# Altium PCB PCB1.PcbDoc
Units mm, origin at the board's own origin, x right, y up, seen from the top; angles counter-clockwise.
Board outline 40 x 25 mm, 2 copper layers (Top Layer, Bottom Layer); 19 components, 8 nets, 76 pads, 13 vias.
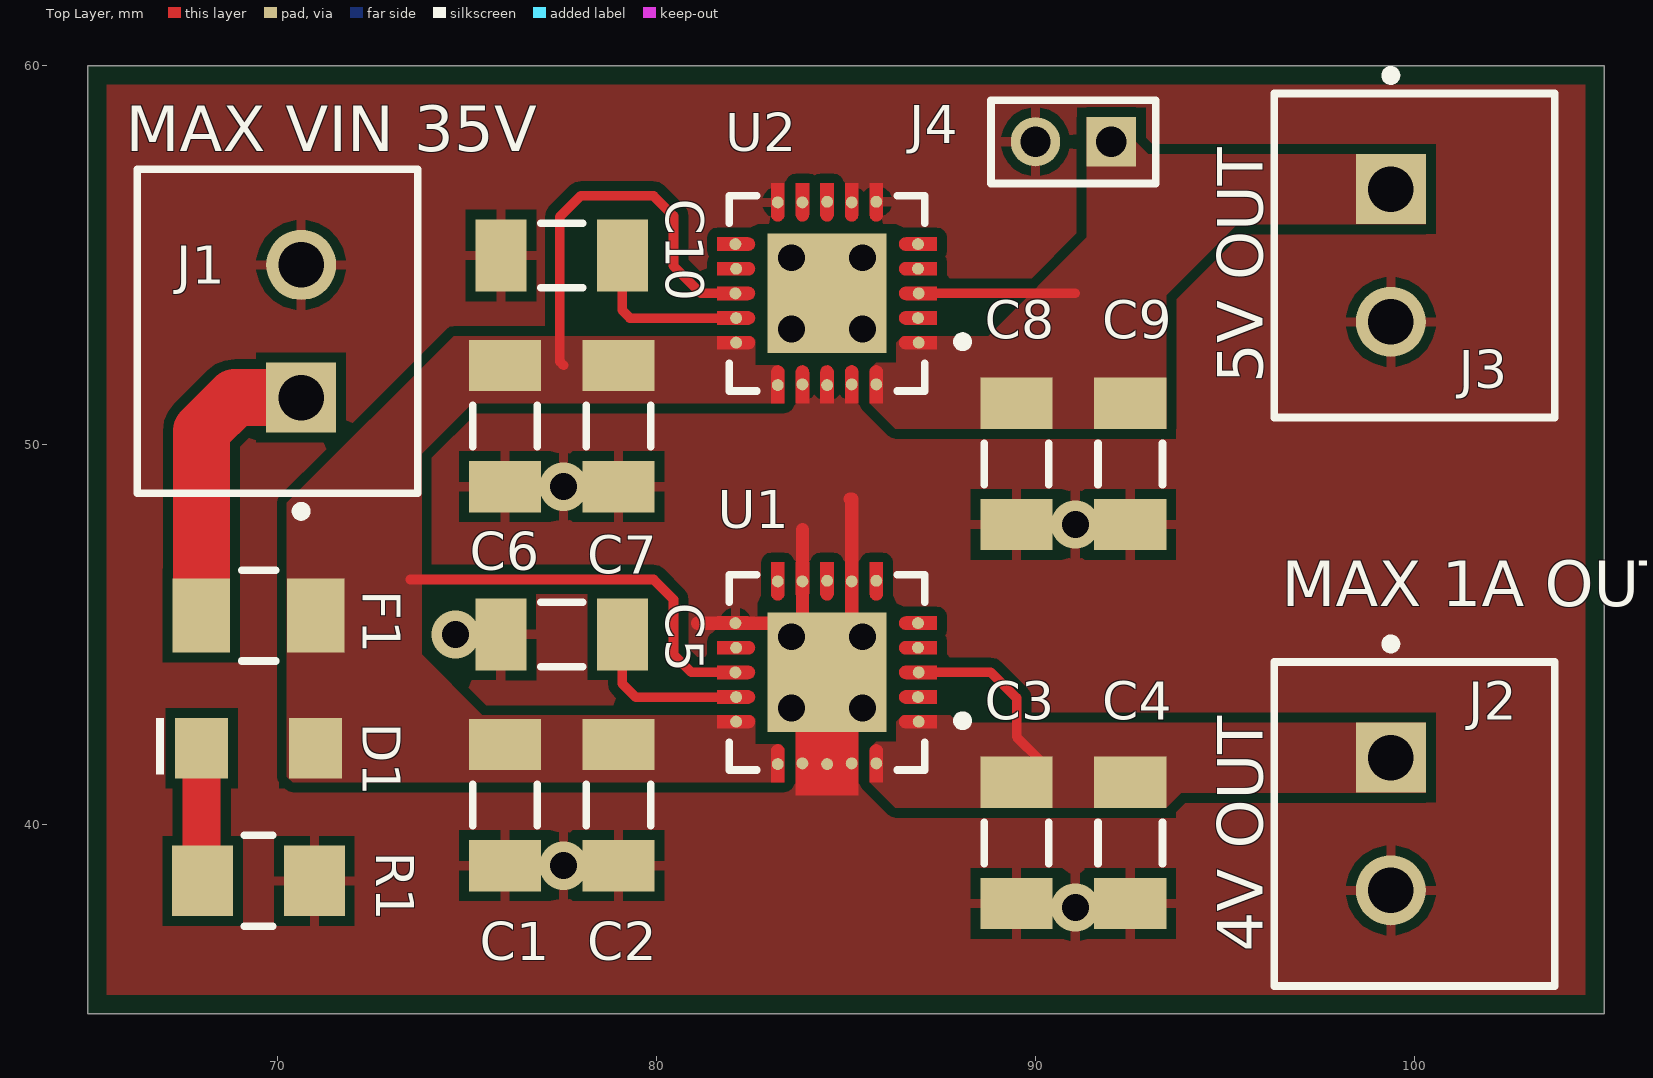
[diagram p0: Top Layer view]
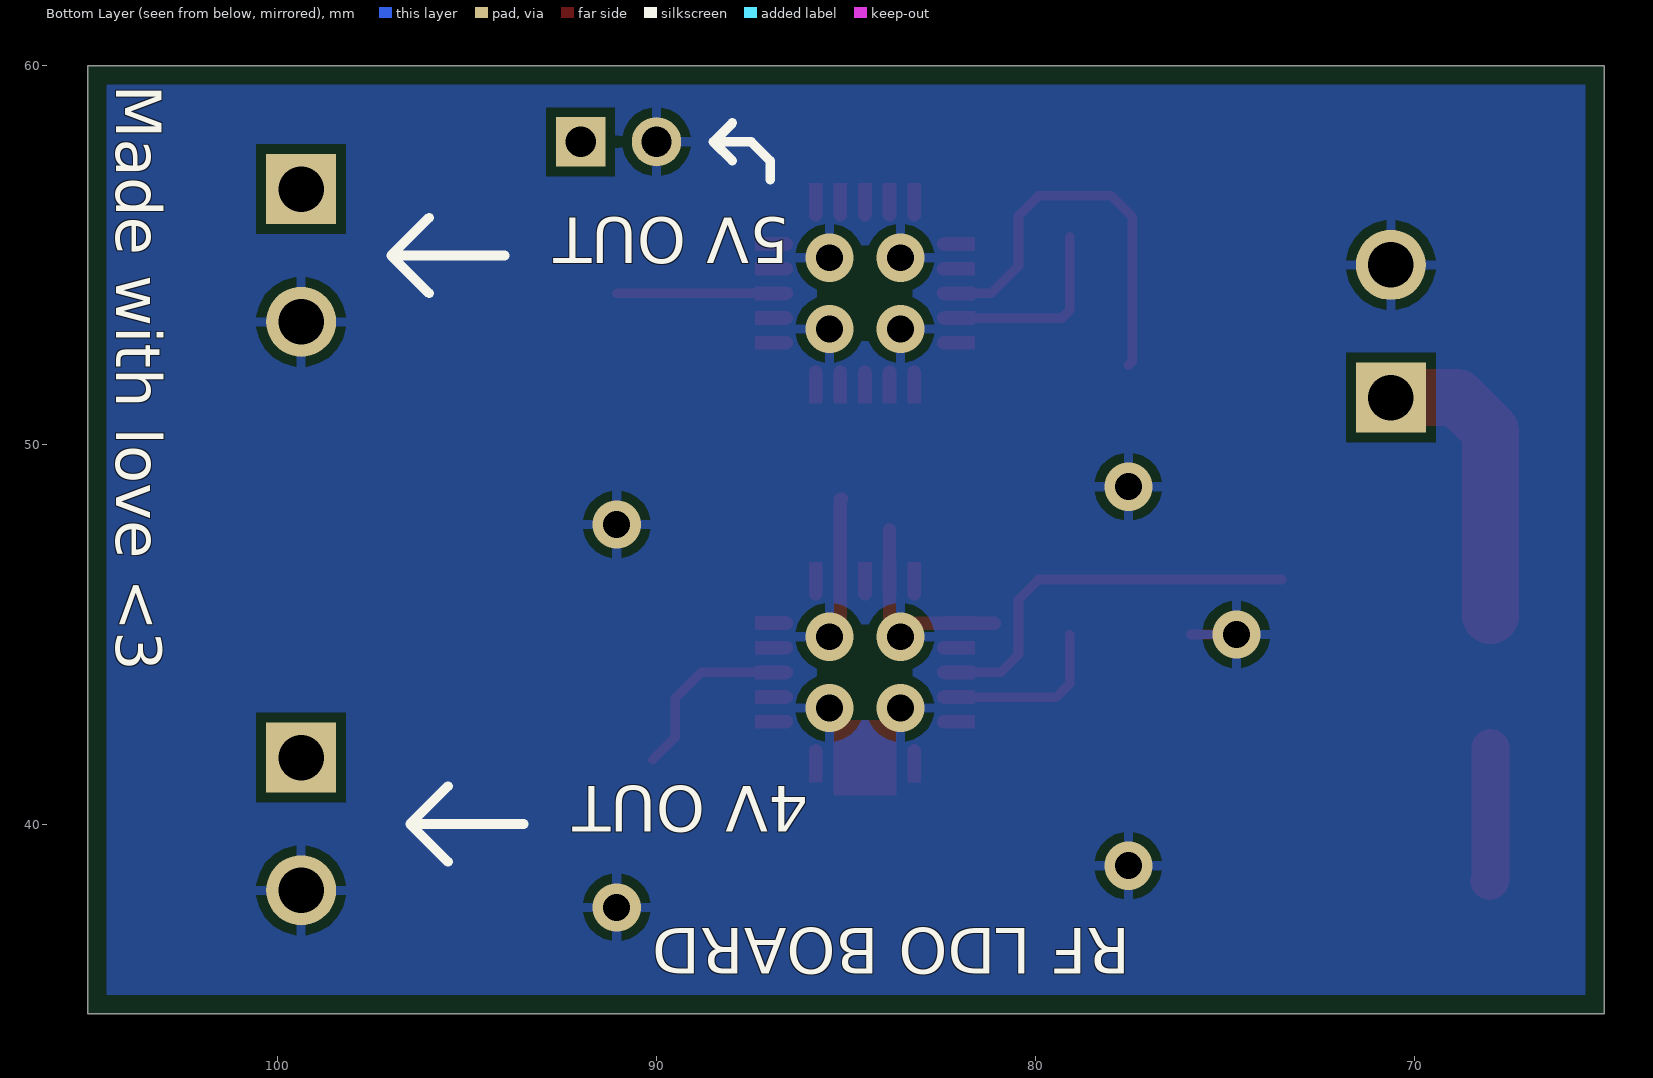
[diagram p1: Bottom Layer view, seen from below]

## Layer stack, top to bottom
Top Solder: solder mask 0.0102, Solder Resist, Dk 3.5
Top Layer: signal copper 0.0356
Dielectric 1: dielectric 0.32, FR-4, Dk 4.8
Bottom Layer: signal copper 0.0356
Bottom Solder: solder mask 0.0102, Solder Resist, Dk 3.5

## Board outline
65,35 105,35 105,60 65,60

## Design rules (kind name [scope] priority, off if disabled: settings)
AssemblyTestPointUsage [All] p1: isadvanced=TRUE
AssemblyTestpoint [All] p1: isadvanced=TRUE testpointundercomponent=TRUE minsize=1.016 maxsize=2.54 preferedsize=1.524 minholesize=0 maxholesize=1.016 preferedholesize=0.813 testpointgrid=0.025 usegrid=TRUE gridtolerance=0 allowsidetop=TRUE allowsidebottom=TRUE
Clearance Clearance_1 [OnMid vs OnMid] p1: gap=0.254 ignorepadtopadclearanceinfootprint=FALSE sourcerule=39 cellrowname=All cellrowtype=0 cellcolname=All cellcoltype=0 innerlayers=TRUE
Clearance Clearance_2 [(ExistsOnLayer('Top Layer') Or ExistsOnLayer('Bottom Layer')) vs (ExistsOnLayer('Top Layer') Or ExistsOnLayer('Bottom Layer'))] p2: gap=0.254 ignorepadtopadclearanceinfootprint=FALSE sourcerule=39 cellrowname=All cellrowtype=0 cellcolname=All cellcoltype=0 outerlayers=TRUE
Clearance [All] p3: gap=0.254 ignorepadtopadclearanceinfootprint=FALSE ismatrix=TRUE
ComponentClearance [All] p1: isadvanced=TRUE gap=0.254 collisioncheckmode=3 verticalgap=0.254 showdistances=FALSE
FabricationTestPointUsage [All] p1: isadvanced=TRUE valid=0 allowmultiple=FALSE
FabricationTestpoint [All] p1: isadvanced=TRUE side=3 testpointundercomponent=TRUE minsize=1.016 maxsize=2.54 preferedsize=1.524 minholesize=0 maxholesize=1.016 preferedholesize=0.813 testpointgrid=0.025 allowsidetop=TRUE allowsidebottom=TRUE usegrid=TRUE gridtolerance=0
FanoutControl Fanout_BGA [IsBGA] p1: isadvanced=TRUE bgadir=Out bgaviamode=Centered fanoutstyle=Auto fanoutdirection=Alternating viagrid=0.025 // Fanout_BGA (Default Rule)
FanoutControl Fanout_LCC [IsLCC] p2: isadvanced=TRUE bgadir=Out bgaviamode=Centered fanoutstyle=Auto fanoutdirection=Alternating viagrid=0.025 // Fanout_LCC (Default Rule)
FanoutControl Fanout_SOIC [IsSOIC] p3: isadvanced=TRUE bgadir=Out bgaviamode=Centered fanoutstyle=Auto fanoutdirection=Alternating viagrid=0.025 // Fanout_SOIC (Default Rule)
FanoutControl Fanout_Small [(CompPinCount < 5)] p4: isadvanced=TRUE bgadir=Out bgaviamode=Centered fanoutstyle=Auto fanoutdirection=OutThenIn viagrid=0.025 // Fanout_Small (Default Rule)
FanoutControl Fanout_Default [All] p5: isadvanced=TRUE bgadir=Out bgaviamode=Centered fanoutstyle=Auto fanoutdirection=Alternating viagrid=0.025 // Fanout_Default (Default Rule)
Height [All] p1: isadvanced=TRUE minheight=0 maxheight=25.4 prefheight=12.7
HoleSize [All] p1: isadvanced=TRUE absolutevalues=TRUE maxlimit=2.54 minlimit=0.025 maxpercent=80.000 minpercent=20.000
HoleToHoleClearance [All] p1: isadvanced=TRUE gap=0.254 allowstackedmicrovias=TRUE
LayerPairs [All] p1: isadvanced=TRUE enforce=TRUE
MinimumSolderMaskSliver [All] p1: isadvanced=TRUE minsoldermaskwidth=0.254
NetAntennae [All] p1: isadvanced=TRUE netantennaetolerance=0
PasteMaskExpansion [All] p1: isadvanced=TRUE expansion=0
PlaneClearance [All] p1: isadvanced=TRUE clearance=0.508
PlaneConnect PowerPlaneConnectStyle_1 [InNet('VIN_FUSED')] p1: isadvanced=TRUE planeconnectstyle=Direct reliefexpansion=0.508 reliefentries=2 reliefconductorwidth=0.254 reliefairgap=0.254
PlaneConnect [All] p2: isadvanced=TRUE planeconnectstyle=Relief reliefexpansion=0.508 reliefentries=4 reliefconductorwidth=0.254 reliefairgap=0.254
PolygonConnect PolygonConnectStyle_1 [InNet('VIN_FUSED') OR InNet('4Vo') OR InNet('5Vo')] p1: isadvanced=TRUE connectstyle=Direct reliefconductorwidth=0.254 reliefentries=2 polygonreliefangle="0 Angle" airgapwidth=0.254
PolygonConnect [All] p2: connectstyle=Relief reliefconductorwidth=0.254 reliefentries=4 polygonreliefangle="90 Angle" airgapwidth=0.254
RoutingCorners [All] p1: isadvanced=TRUE cornerstyle=45-Degree minsetback=2.54 maxsetback=2.54
RoutingPriority [All] p1: isadvanced=TRUE routingpriority=0
RoutingVias [All] p1: holewidth=0.711 width=1.27 viastyle="Through Hole" minholewidth=0.711 minwidth=1.27 maxholewidth=0.711 maxwidth=1.27
ShortCircuit [All] p1: isadvanced=TRUE allowed=FALSE
SilkToSilkClearance [All] p1: isadvanced=TRUE silktosilkclearance=0.254
SilkToSolderMaskClearance [IsPad] p1: isadvanced=TRUE minsilkscreentomaskgap=0.254 clearancetoexposedcopper=TRUE
SolderMaskExpansion [All] p1: isadvanced=TRUE expansion=0.102 istentingtop=FALSE
SupplyNets "Schematic Supply Nets" [InNet('GND')] p1: isadvanced=TRUE voltage=0.000
UnRoutedNet [All] p1: isadvanced=TRUE
UnpouredPolygon [All] p1: isadvanced=TRUE
Width [All] p1: maxlimit=5 minlimit=0.2 preferedwidth=0.3 minimp=50.000000 maximp=50.000000 favimp=50.000000
4 further rules are at their usual default settings.

## Components (designator, comment, footprint, x,y, rotation, side; value= is the part's Value field where it differs from the comment)
C1 "10uF 16VDC" CAPC1206(3216)170_M 76,40.5 r90 top value=4.7nF
C2 "10uF 16VDC" CAPC1206(3216)170_M 79,40.5 r90 top value=4.7nF
C3 "47uF 10VDC" CAPC1206(3216)170_M 89.5,39.5 r90 top value=4.7nF
C4 "47uF 10VDC" CAPC1206(3216)170_M 92.5,39.5 r90 top value=4.7nF
C5 "1uF 50VDC" CAPC1206(3216)170_M 77.5,45 r0 top value=4.7nF
C6 "10uF 16VDC" CAPC1206(3216)170_M 76,50.5 r90 top value=4.7nF
C7 "10uF 16VDC" CAPC1206(3216)170_M 79,50.5 r90 top value=4.7nF
C8 "47uF 10VDC" CAPC1206(3216)170_M 89.5,49.5 r90 top value=4.7nF
C9 "47uF 10VDC" CAPC1206(3216)170_M 92.5,49.5 r90 top value=4.7nF
C10 "1uF 50VDC" CAPC1206(3216)170_M 77.5,55 r0 top value=4.7nF
D1 "150120BS75000" WL-SMCW_1206_150120xx75000 69.5,42 r0 top
F1 "200mA/500mA 1206 PTC" FP-nanoSMD400LR-IPC_A 69.5,45.5 r0 top
J1 "1843606" FP-1843606-MFG 70,53 r90 top
J2 "1843606" FP-1843606-MFG 100,40 r270 top
J3 "1843606" FP-1843606-MFG 100,55 r270 top
J4 "M22-2510205" FP-M22-2510205-MFG 91,58 r180 top
R1 "8.2k Ohm" FP-RMCF1206-IPC_A 69.5,38.5 r180 top
U1 "TPS7A4701RGWT" FP-RGW0020A-MFG 84.5,44 r180 top
U2 "TPS7A4701RGWT" FP-RGW0020A-MFG 84.5,54 r180 top

## Footprints (in the part's own frame and the unit in brackets; to place one, negate y for a bottom-side part, rotate by r counter-clockwise, add the part's x,y. Pads: shape width x height; smd on the part's side, far side on the other; paste and mask are expansions set on the pad)
CAPC1206(3216)170_M [mm] "Chip Capacitor, Body 3.2x1.6mm, Height 1.7mm, IPC Low Density"
  rect 1.35x1.9 smd: 1(-1.6,0) 2(1.6,0)
  silkscreen extent -0.55,-0.85 0.55,0.85, body extent -1.7,-0.9 1.7,0.9, height 1.7
FP-1843606-MFG [mm]
  rect 1.85x1.85 hole 1.2 paste-2539.97 mask+0: 1(-1.75,-0.625)
  round 1.85 hole 1.2 paste-2539.97 mask+0: 2(1.75,-0.625)
  silkscreen extent -4.87,-3.7 4.28,3.7, body extent -4.38,-3.8 4.38,3.8, height 0.25
FP-M22-2510205-MFG [mm]
  rect 1.3x1.3 hole 0.8 paste-2539.97 mask+0: 1(-1,0)
  round 1.3 hole 0.8 paste-2539.97 mask+0: 2(1,0)
  silkscreen extent -2.17,-1.1 2.17,1.1, body extent -2.27,-1.2 2.27,1.2, height 0.25
FP-nanoSMD400LR-IPC_A [mm]
  rect 1.519x1.955 smd paste+0 mask+0: 1(-1.508,0) 2(1.508,0)
  silkscreen extent -0.45,-1.2 0.45,1.2, body extent -2.77,-1.48 2.77,1.48, height 0.25
FP-RGW0020A-MFG [mm]
  round 0.315 smd paste-1000 mask+0: 1(-2.418,1.3) 2(-2.4,0.65) 3(-2.418,0) 4(-2.4,-0.65) 5(-2.4,-1.3) 6(-1.3,-2.418) 7(-0.65,-2.4) 8(0,-2.418) 9(0.65,-2.4) 10(1.3,-2.4) 11(2.418,-1.3) 12(2.4,-0.65) 13(2.418,0) 14(2.4,0.65) 15(2.4,1.3) 16(1.3,2.418) 17(0.65,2.4) 18(0,2.418) 19(-0.65,2.4) 20(-1.3,2.4)
  rect 3.15x3.15 smd paste-1000 mask+0: 21(0,0)
  Top Layer region: -2.9,0.825 -2.075,0.825 -2.008,0.812 -1.951,0.774 -1.913,0.717 -1.9,0.65 -1.9,0.65 -1.913,0.583 -1.951,0.526 -2.008,0.488 -2.075,0.475 -2.075,0.475 -2.9,0.475
  Top Layer region: -2.9,-0.475 -2.075,-0.475 -2.008,-0.488 -1.951,-0.526 -1.913,-0.583 -1.9,-0.65 -1.9,-0.65 -1.913,-0.717 -1.951,-0.774 -2.008,-0.812 -2.075,-0.825 -2.075,-0.825 -2.9,-0.825
  Top Layer region: -2.9,-1.125 -2.075,-1.125 -2.008,-1.138 -1.951,-1.176 -1.913,-1.233 -1.9,-1.3 -1.9,-1.3 -1.913,-1.367 -1.951,-1.424 -2.008,-1.462 -2.075,-1.475 -2.075,-1.475 -2.9,-1.475
  Top Layer region: 2.9,-0.825 2.075,-0.825 2.008,-0.812 1.951,-0.774 1.913,-0.717 1.9,-0.65 1.9,-0.65 1.913,-0.583 1.951,-0.526 2.008,-0.488 2.075,-0.475 2.075,-0.475 2.9,-0.475
  Top Layer region: 2.9,-0.175 2.075,-0.175 2.008,-0.162 1.951,-0.124 1.913,-0.067 1.9,0 1.9,0 1.913,0.067 1.951,0.124 2.008,0.162 2.075,0.175 2.075,0.175 2.9,0.175
  Top Layer region: 2.9,0.475 2.075,0.475 2.008,0.488 1.951,0.526 1.913,0.583 1.9,0.65 1.9,0.65 1.913,0.717 1.951,0.774 2.008,0.812 2.075,0.825 2.075,0.825 2.9,0.825
  Top Layer region: 2.9,1.125 2.075,1.125 2.008,1.138 1.951,1.176 1.913,1.233 1.9,1.3 1.9,1.3 1.913,1.367 1.951,1.424 2.008,1.462 2.075,1.475 2.075,1.475 2.9,1.475
  Top Layer region: -1.475,-2.9 -1.475,-2.075 -1.462,-2.008 -1.424,-1.951 -1.367,-1.913 -1.3,-1.9 -1.3,-1.9 -1.233,-1.913 -1.176,-1.951 -1.138,-2.008 -1.125,-2.075 -1.125,-2.075 -1.125,-2.9
  Top Layer region: -0.175,-2.9 -0.175,-2.075 -0.162,-2.008 -0.124,-1.951 -0.067,-1.913 0,-1.9 0,-1.9 0.067,-1.913 0.124,-1.951 0.162,-2.008 0.175,-2.075 0.175,-2.075 0.175,-2.9
  Top Layer region: 1.125,-2.9 1.125,-2.075 1.138,-2.008 1.176,-1.951 1.233,-1.913 1.3,-1.9 1.3,-1.9 1.367,-1.913 1.424,-1.951 1.462,-2.008 1.475,-2.075 1.475,-2.075 1.475,-2.9
  Top Layer region: 1.475,2.9 1.475,2.075 1.462,2.008 1.424,1.951 1.367,1.913 1.3,1.9 1.3,1.9 1.233,1.913 1.176,1.951 1.138,2.008 1.125,2.075 1.125,2.075 1.125,2.9
  Top Layer region: -1.125,2.9 -1.125,2.075 -1.138,2.008 -1.176,1.951 -1.233,1.913 -1.3,1.9 -1.3,1.9 -1.367,1.913 -1.424,1.951 -1.462,2.008 -1.475,2.075 -1.475,2.075 -1.475,2.9
  Top Layer region: -2.9,1.475 -2.075,1.475 -2.008,1.462 -1.951,1.424 -1.913,1.367 -1.9,1.3 -1.9,1.3 -1.913,1.233 -1.951,1.176 -2.008,1.138 -2.075,1.125 -2.075,1.125 -2.9,1.125
  Top Layer region: -2.9,0.175 -2.075,0.175 -2.008,0.162 -1.951,0.124 -1.913,0.067 -1.9,0 -1.9,0 -1.913,-0.067 -1.951,-0.124 -2.008,-0.162 -2.075,-0.175 -2.075,-0.175 -2.9,-0.175
  Top Layer region: -0.825,-2.9 -0.825,-2.075 -0.812,-2.008 -0.774,-1.951 -0.717,-1.913 -0.65,-1.9 -0.65,-1.9 -0.583,-1.913 -0.526,-1.951 -0.488,-2.008 -0.475,-2.075 -0.475,-2.075 -0.475,-2.9
  Top Layer region: 0.475,-2.9 0.475,-2.075 0.488,-2.008 0.526,-1.951 0.583,-1.913 0.65,-1.9 0.65,-1.9 0.717,-1.913 0.774,-1.951 0.812,-2.008 0.825,-2.075 0.825,-2.075 0.825,-2.9
  Top Layer region: 2.9,-1.475 2.075,-1.475 2.008,-1.462 1.951,-1.424 1.913,-1.367 1.9,-1.3 1.9,-1.3 1.913,-1.233 1.951,-1.176 2.008,-1.138 2.075,-1.125 2.075,-1.125 2.9,-1.125
  Top Layer region: 0.175,2.9 0.175,2.075 0.162,2.008 0.124,1.951 0.067,1.913 0,1.9 0,1.9 -0.067,1.913 -0.124,1.951 -0.162,2.008 -0.175,2.075 -0.175,2.075 -0.175,2.9
  Top Layer region: 0.825,2.9 0.825,2.075 0.812,2.008 0.774,1.951 0.717,1.913 0.65,1.9 0.65,1.9 0.583,1.913 0.526,1.951 0.488,2.008 0.475,2.075 0.475,2.075 0.475,2.9
  Top Layer region: -0.475,2.9 -0.475,2.075 -0.488,2.008 -0.526,1.951 -0.583,1.913 -0.65,1.9 -0.65,1.9 -0.717,1.913 -0.774,1.951 -0.812,2.008 -0.825,2.075 -0.825,2.075 -0.825,2.9
  silkscreen extent -3.7,-2.58 2.58,2.58, body extent -3,-3 3,3, height 0.25
FP-RMCF1206-IPC_A [mm]
  rect 1.604x1.858 smd paste+0 mask+0: 1(-1.476,0) 2(1.476,0)
  silkscreen extent -0.37,-1.2 0.37,1.2, body extent -2.78,-1.43 2.78,1.43, height 0.25
WL-SMCW_1206_150120xx75000 [mm] "SMD Mono-color Chip LED, body 3.2x1.6mm"
  rect 1.4x1.6 smd: 1(-1.5,0) 2(1.5,0)
  silkscreen extent -2.7,-0.7 -2.5,0.8, body extent -1.6,-0.8 1.6,0.8, height 0.68

## Part data
C1 C2 C6 C7: library part CMP-1037-03125-1, "CL31B106KOHNNNE10uF 16VDC", Case-EIA=1206, Case-Metric=3216, Rated Voltage="100 V", Tolerance=Â±2%, Max Thickness="1.7 mm", Technology=SMT
C3 C4 C8 C9: library part CMP-1037-03125-1, "CL31A476MPHNNN 47uF 10V", Case-EIA=1206, Case-Metric=3216, Rated Voltage="100 V", Tolerance=Â±2%, Max Thickness="1.7 mm", Technology=SMT
C5 C10: library part CMP-1037-03125-1, "CC1206KKX7R7BB1051uF 50VDC", Case-EIA=1206, Case-Metric=3216, Rated Voltage="100 V", Tolerance=Â±2%, Max Thickness="1.7 mm", Technology=SMT
D1: library part CMP-1426-00015-3, "WL-SMCW SMT Mono-Color Chip LED Waterclear", Case Code (Metric)=3216, Case Code (Imperial)=1206, Color=Blue, Forward Current=100mA, Forward Voltage=3.2V, Manufacturer Package Identifier=LED_1206, Max Operating Temperature=85°C, Max Reverse Voltage (DC)=5V, Min Operating Temperature=-40°C, Test Current=20mA, Case/Package=1206, Dominant Wavelength=470nm, Height=680µm, Length=3.2mm, Lens Style="Clear, Rectangular", Luminous Intensity=145mcd, Mount="Surface Mount", Packaging="Tape and Reel", Peak Wavelength=465nm, REACH SVHC=Unknown, RoHS=Compliant, Viewing Angle=140°, Wavelength=470nm, Width=1.6mm
F1: library part CMP-08606-000072-1, "PTC RESET FUSE 6V 4A 1206", RoHS Compliant=Yes
J1 J2 J3: library part CMP-00298-00064326-1, "1843606 Phoenix Contact 1843606 MCV 1, 5/ 2-G-3, 5 2 Way Terminal Block Header 8A 3.5mm", Ambient Temperature Range High=100°C, Color=Green, Current=8A, Flammability Rating="UL94 V-0", Min Operating Temperature=-40°C, Voltage=300V, Voltage Rating=160V, Voltage Rating (DC)=640mV, Approvals="CSA, UL", Connector Type=Plug, Contact Material=Tin, Contact Plating=Tin, Current Rating=8A, Depth=7.25mm, Gender=Male, Height=8.4mm, Housing Color=Green, Housing Material=Polybutylene, Lead Free="Lead Free", Lead Pitch=3.81mm, Length=8.4mm, Material=PBT, Max Current Rating=8A, Max Operating Temperature=100°C, Mount="Through Hole", NexarPartId=64326, Number of Contacts=2, Number of Levels=1, Number of Poles=2, Number of Positions=2, Number of Positions Per Level=2, Number of Rows=1, Orientation=Straight, Pitch=3.5mm, REACH SVHC="No SVHC", RoHS=Compliant, Termination=Solder, Voltage Rating (AC)=160V, Weight=113.398093g, Width=7.25mm
J4: library part CMP-15831-000005-1, "CONN HEADER VERT 2POS 2MM", Current Rating=2A, Manufacturer=Harwin, Package=0, Temperature="-40°C to +105°C", Temperature Range High=+105°C, Temperature Range Low=-40°C, Automotive=No, Category=Conn, ComponentLink2Description=Datasheet, ComponentLink2URL=https://cdn.harwin.com/pdfs/C018XX_M22_Series_Connectors.pdf, Conn Gender=Male, Conn Orientation=Vertical, Contact Material=Gold,Nickel, Device Class L1=Connectors, Device Class L2="Headers and Wire Housings", Device Class L3=unset, Digikey Description="CONN HEADER VERT 2POS 2MM", Footprint Url=https://cdn.harwin.com/pdfs/M22-251.pdf, Height=5.45mm, Lead Free=Yes, Manufacturer Part Number=M22-2510205, Mouser Description="Headers & Wire Housings 2 PIN SIL VERTICAL GOLD PIN HEADER", Number of Contacts=2, Number of Rows=1, Octopart=https://octopart.com/m22-2510205-harwin-2538221, Pitch=2mm, RoHS=TRUE
R1: library part CMP-26527-000539-1, "8.2k Ohm 1206", Case/Package=1206, Max Operating Temperature=155°C, Max Power Dissipation=250mW, Min Operating Temperature=-55°C, Package Quantity=10000, Resistance=63.4kR, Resistor Type="Thick Film", Temperature Coefficient=100ppm/°C, Tolerance=1%, Contact Plating=Tin, Features="Automotive AEC-Q200", Height=0.028inch, Length=0.126inch, Mount="Surface Mount", Number of Terminations=2, Packaging="Tape and Reel", Radiation Hardening=No, RoHS Compliant=Yes, Series=RMCF, Width=0.063inch
U1 U2: library part CMP-04917-000017-1, "IC REG LINEAR POS ADJ 1A 20VQFN", Dropout Voltage=307mV, Manufacturer="Texas Instruments", Max Junction Temp=+125°C, Max Supply Voltage=35V, Min Supply Voltage=3V, Nominal Supply Current=0.58-6.1mA, Output Current=1A, Output Voltage=1.4-34mV, Package=RGW0020A, Temperature="-40°C to +125°C", Temperature Range Low=-40°C, Accuracy Percentage=2.5%, Automotive=No, Category=IC, ComponentLink2Description=Datasheet, ComponentLink2URL=http://www.ti.com/lit/ds/symlink/tps7a47.pdf, Device Class L1="Integrated Circuits (ICs)", Device Class L2="Power Management ICs", Device Class L3="Voltage Regulators - Linear", Digikey Description="IC REG LINEAR POS ADJ 1A 20VQFN", Height=1mm, Lead Free=Yes, Manufacturer Part Number=TPS7A4701RGWT, Mouser Description="LDO Voltage Regulators 36V 1A 4.17uVRMS RF LDO VTG Reg", Number Of Outputs=1, Octopart=https://octopart.com/tps7a4701rgwt-texas+instruments-30261754, Output Type=AdjustableProgrammable, RoHS=TRUE, Standoff Height=0mm, Temperature Range High=+125°C

## Via types
v1: diameter 1.27, hole 0.711, Top Layer to Bottom Layer, 13 vias

## Nets (pads, with @x,y where several pads share a name; then routed paths per layer and width w, separated by ;. In a path a pad name is that pad's centre, name@x,y a point inside that pad or via, vN(x,y) a via of type N, cw(c..) or ccw(c..) an arc to the next point about the centre after c; other vN are vias at no path point)
4Vo: C3.2 C4.2 J2.1 U1.1 U1.3 U1.20 | length 4.7
  Top Layer w0.25: U1.3 88.825,44 89.5,43.325 89.5,42.3 C3.2@90.104,41.696
5Vo: C8.2 C9.2 J3.1 J4.1 U2.1 U2.3 U2.20 | length 4.1
  Top Layer w0.25: U2.3 91.05,54
GND: C1.1 C2.1 C3.1 C4.1 C5.1 C6.1 C7.1 C8.1 C9.1 C10.1 J1.2 J2.2 J3.2 J4.2 R1.1 U1.7 U1.9 U1.11 U1.17 U1.18 U1.19 U1.21 U2.6 U2.7 U2.10 U2.17 U2.18 U2.19 U2.21 | length 10.8
  Top Layer w0.254: v1(74.7,45) C5.1
  Top Layer w0.35: 81.079,45.3 U1.11 83.56,45.3 v1(83.56,44.94) 83.85,45.23 U1.9 83.85,47.773 ; 85.115,48.575 85.15,48.575 U1.7 85.15,45.23 v1(85.44,44.94)
  other v1: 91.05,37.8 77.55,38.9 83.56,43.06 85.44,43.06 91.05,47.9 77.55,48.9 83.56,53.06 85.44,53.06 83.56,54.94 85.44,54.94
LED: D1.1 R1.2 | length 3.5
  Top Layer w1: D1.1 68,38.524 R1.2
NetC5_2: C5.2 U1.14 | length 4.4
  Top Layer w0.25: C5.2 79.1,43.696 79.446,43.35 U1.14
NetC10_2: C10.2 U2.14 | length 5
  Top Layer w0.25: C10.2@79.1,55.5 79.1,53.55 79.3,53.35 U2.14@82.082,53.35
VIN: F1.1 J1.1 | length 7.9
  Top Layer w1.5: F1.1 67.992,50.371 68.87,51.25 J1.1
VIN_FUSED: C1.2 C2.2 C6.2 C7.2 D1.2 F1.2 U1.13 U1.15 U1.16 U2.13 U2.15 U2.16 | length 21.1
  Top Layer w0.254: 73.5,46.45 79.925,46.45 80.45,45.925 80.45,44.475 80.925,44 U1.13 ; 77.55,52.1 77.45,52.2 77.45,56.025 78,56.575 79.92,56.575 80.45,56.045 80.45,54.725 81.175,54 U2.13@82.065,54
pads on no net: U1.2 U1.4 U1.5 U1.6 U1.8 U1.10 U1.12 U2.2 U2.4 U2.5 U2.8 U2.9 U2.11 U2.12

## Polygon pours and split planes (outlines as drawn)
GND on Top Layer "GND_L01_P004" (solid, remove dead copper, pour order 4): 65.5,59.5 104.5,59.5 104.5,35.5 65.5,35.5
VIN_FUSED on Top Layer "VIN_FUSED_L01_P000" (solid, remove dead copper, pour order 0): 82.6,42.1 83.272,42.1 83.375,41.997 83.375,41.1 70.4,41.1 70.248,41.252 70.248,48.473 74.65,52.875 81.4,52.875 82.497,52.875 82.6,52.772 82.6,52.1 83.272,52.1 83.375,51.997 83.375,51.1 75.132,51.1 73.8,49.768 73.8,44.475 75.4,42.875 77.45,42.875 82.497,42.875 82.6,42.772
4Vo on Top Layer "4VO_L01_P003" (solid, remove dead copper, pour order 3): 93.45,40.425 93.85,40.825 100.3,40.825 100.3,42.675 87.95,42.675 87.75,42.875 86.503,42.875 86.329,42.701 86.329,42.171 85.799,42.171 85.625,41.997 85.625,41.1 86.3,40.425
5Vo on Top Layer "5VO_L01_P001" (solid, remove dead copper, pour order 1): 88.75,52.875 91.35,55.475 91.35,58.65 92.65,58.65 92.65,58 92.975,57.675 100.3,57.675 100.3,55.825 95.325,55.825 93.45,53.95 93.45,50.425 86.3,50.425 85.625,51.1 85.625,51.997 85.799,52.171 86.329,52.171 86.329,52.701 86.503,52.875
GND on Bottom Layer "GND_L02_P005" (solid, remove dead copper, pour order 5): 65.5,59.5 104.5,59.5 104.5,35.5 65.5,35.5

## Other copper
Top Layer:
  region net GND: 83.675,42.735 85.325,42.735 85.325,41.1 85.325,40.762 83.675,40.762 83.675,41.925

## Silkscreen, mask and mechanical layers (free items; w line width, h text height)
Top Overlay:
  text "MAX VIN 35V" at 66,57.75 h1.2
  text "5V OUT" at 96,51.625 h1.2 r90
  text "MAX 1A OUT" at 96.5,45.75 h1.2
  text "4V OUT" at 96,36.631 h1.2 r90
Bottom Overlay:
  lines w0.254: 87,57 87,57.5 87.5,58 88.5,58 ; 88,57.5 88.5,58 ; 88,58.5 88.5,58 ; 93.5,40 96.5,40 ; 94,55 97,55 ; 88.5,58 88.5,58 ; 95.5,39 96.5,40 ; 95.5,39 95.5,39 ; 95.5,39 96.5,40 ; 95.5,41 96.5,40 ; 95.5,41 96.5,40 ; 95.5,41 96.5,40 ; 96,54 97,55 ; 96,54 96,54 ; 97,55 96,56 97,55
  text "Made with love <3" at 104.25,59.5 h1.2 r90
  text "5V OUT" at 86.5,56 h1.2 r180
  text "4V OUT" at 86,41 h1.2 r180
  text "RF LDO BOARD" at 77.5,37.25 h1.2 r180
Mechanical 1:
  the board outline again, w0.2